# Altium PCB L1S2.PcbDoc
Units mm, origin at the board's own origin, x right, y up, seen from the top; angles counter-clockwise.
Board outline 25.4 x 30.61 mm, 2 copper layers (Top Layer, Bottom Layer); 16 components, 18 nets, 72 pads, 4 vias.
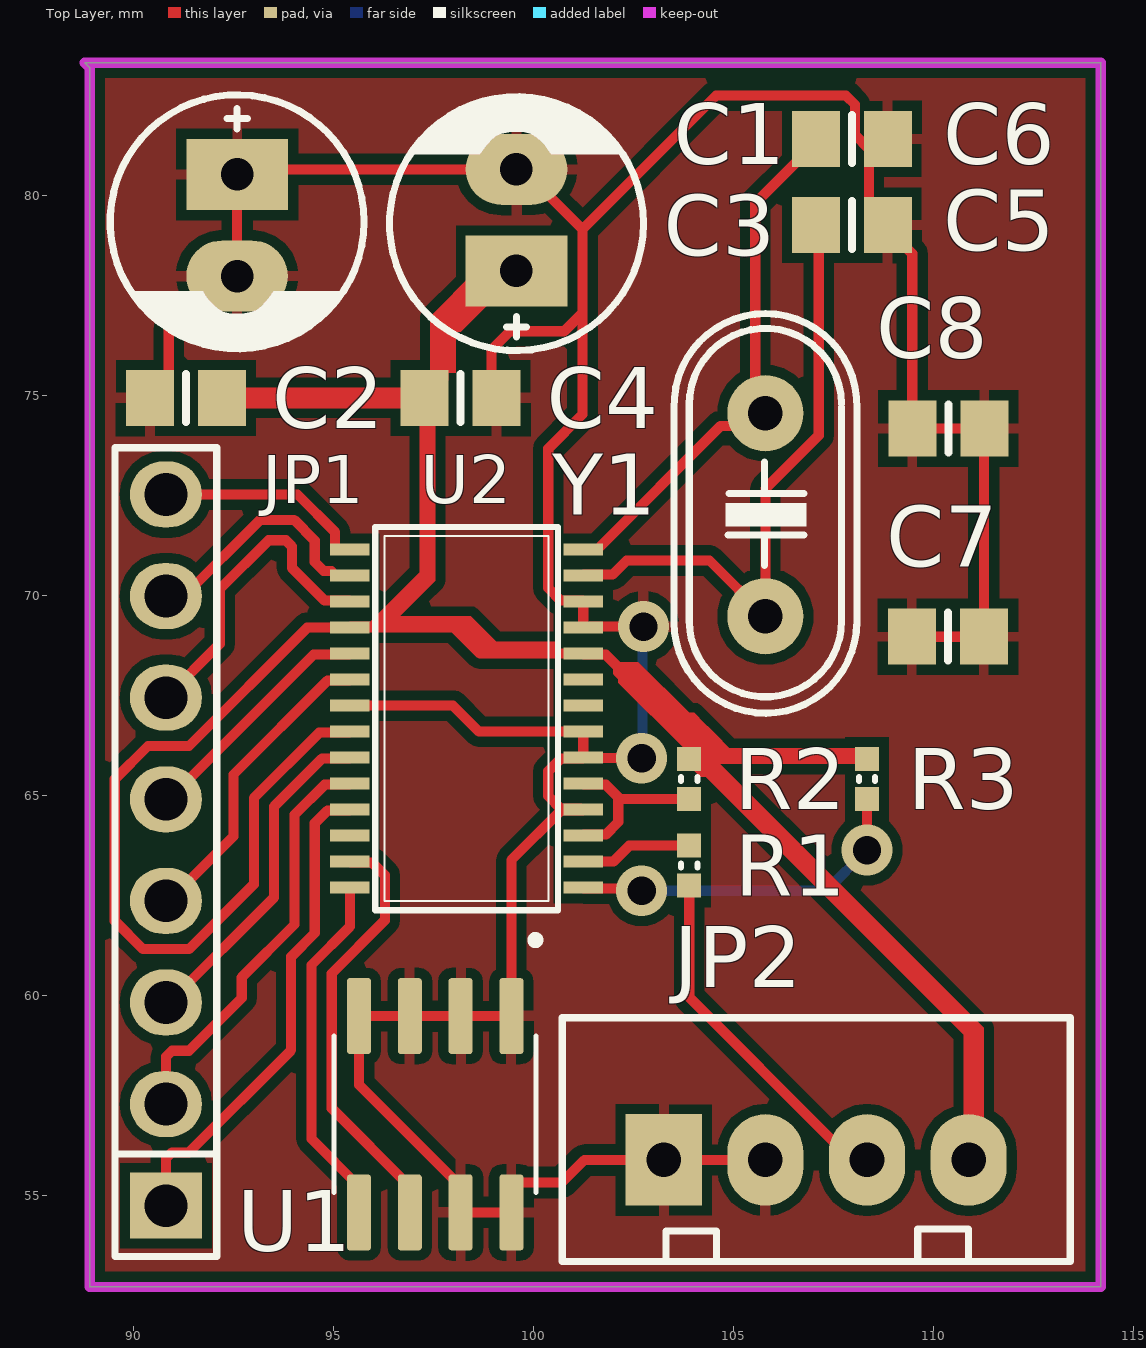
[diagram p0: Top Layer view]
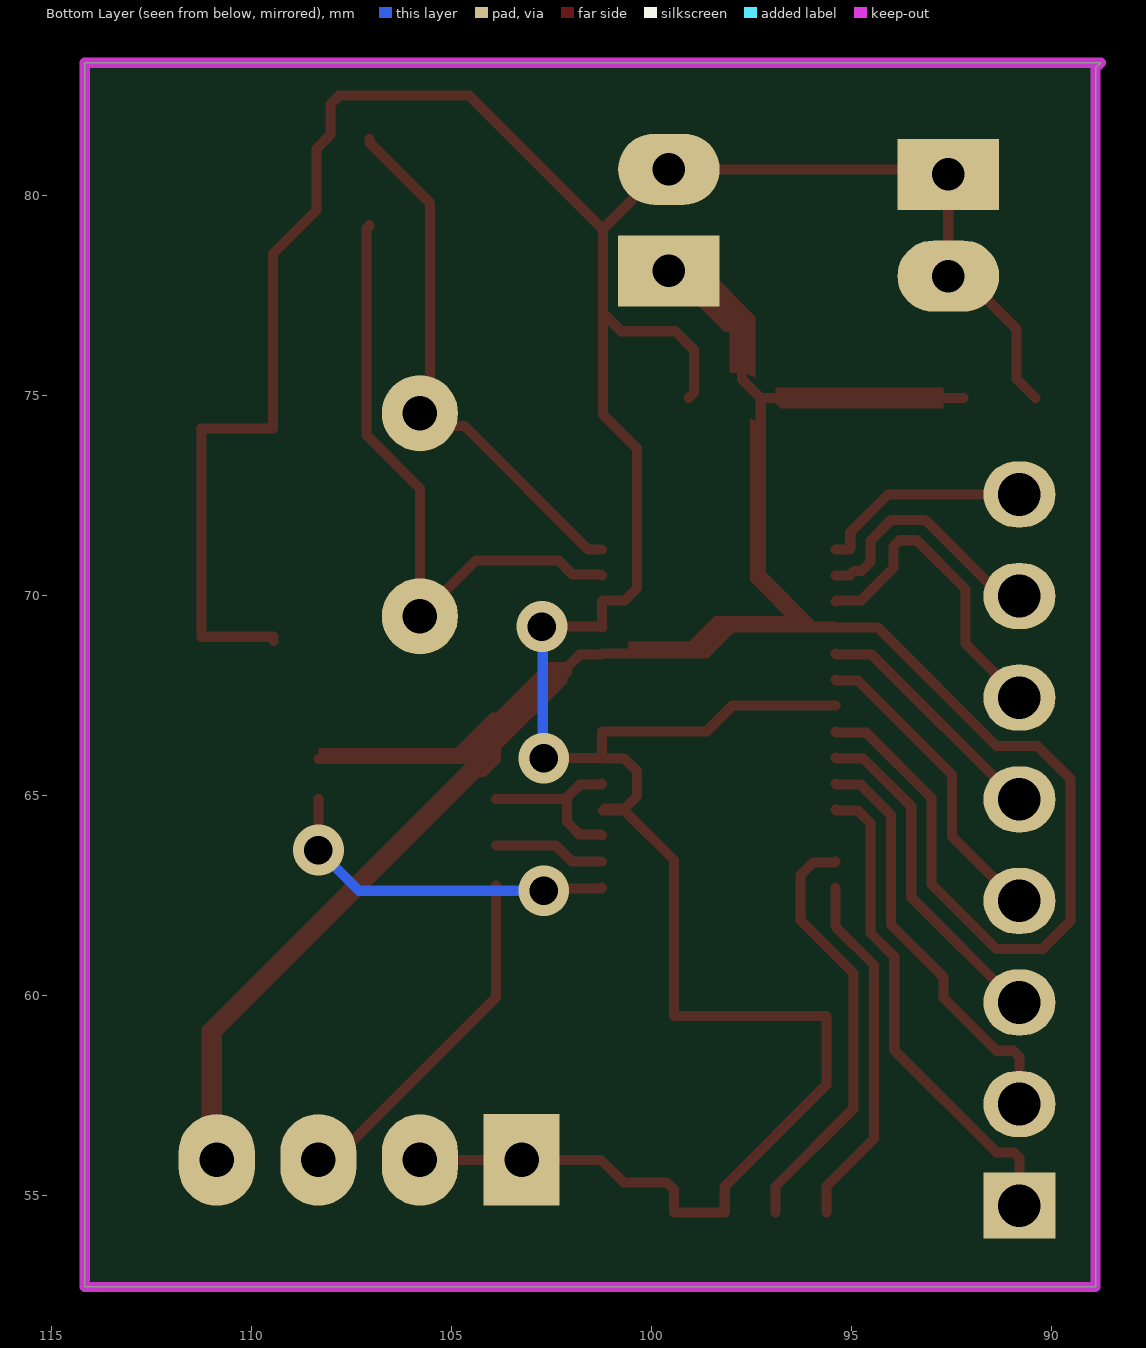
[diagram p1: Bottom Layer view, seen from below]
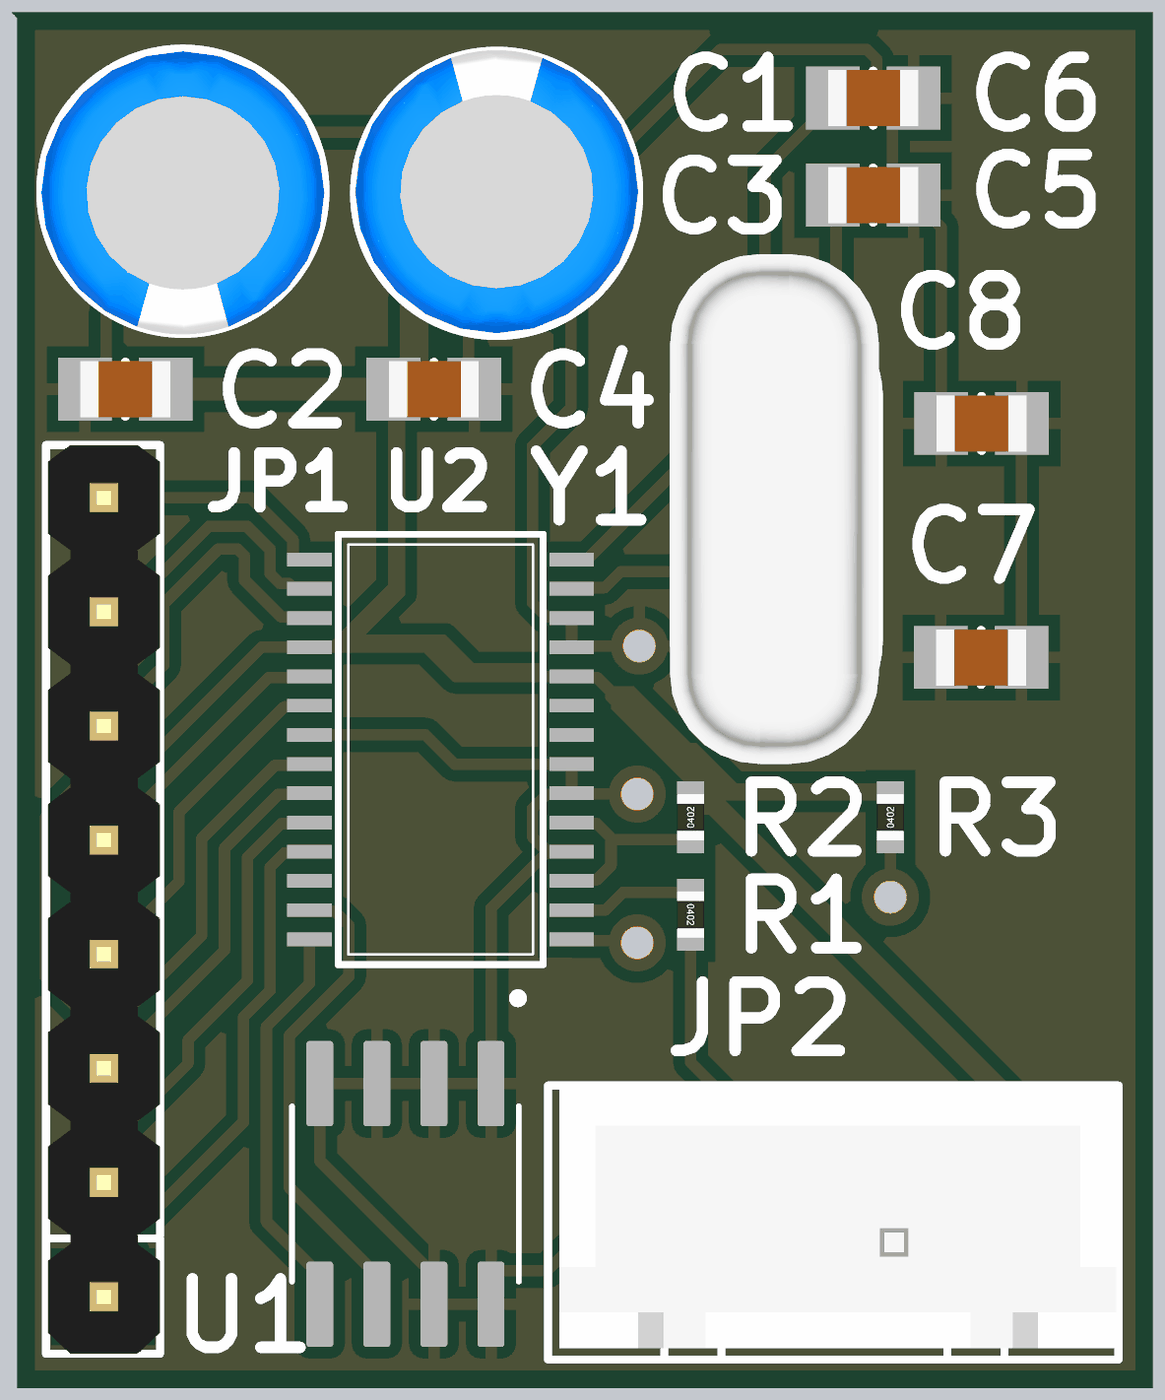
[diagram p2: 3D render of the assembled board from above, using the file's embedded part models]

## Layer stack, top to bottom
Top Solder: solder mask 0.0102, Solder Resist, Dk 3.5
Top Layer: signal copper 0.0356
Dielectric 1: dielectric 0.32, FR-4, Dk 4.8
Bottom Layer: signal copper 0.0356
Bottom Solder: solder mask 0.0102, Solder Resist, Dk 3.5

## Board outline
88.773,83.312 88.9,83.185 88.9,52.705 114.173,52.705 114.173,83.312

## Design rules (kind name [scope] priority, off if disabled: settings)
Clearance [All] p1: gap=0.254 ignorepadtopadclearanceinfootprint=FALSE except(0: Arc-Hole Track-Hole SMDPad-Hole THPad-Hole Via-Hole Fill-Hole Poly-Hole Region-Hole Text-Hole)
MinimumSolderMaskSliver [All] p1: minsoldermaskwidth=0
PolygonConnect [All] p1: connectstyle=Relief reliefconductorwidth=0.254 reliefentries=4 polygonreliefangle="90 Angle" airgapwidth=0.254
RoutingVias [All] p1: holewidth=0.711 width=1.27 viastyle="Through Hole" minholewidth=0.711 minwidth=1.27 maxholewidth=0.711 maxwidth=1.27
SilkToSolderMaskClearance [IsPad] p1: minsilkscreentomaskgap=0 clearancetoexposedcopper=TRUE
SolderMaskExpansion SolderMaskExpansion_Via [All] p1: expansion=0.102 istentingtop=TRUE
SolderMaskExpansion [IsVia] p2: expansion=0.102 istentingtop=TRUE
Width [All] p1: maxlimit=0.254 minlimit=0.254 preferedwidth=0.254
28 further rules are at their usual default settings.

## Classes and differential pairs
component class L1S2: C1 C2 C4 C5 C6 JP1 JP2 R2 R3 U1 U2 Y1

## Components (designator, comment, footprint, x,y, rotation, side; value= is the part's Value field where it differs from the comment)
C1 "100uF" CP1/2.5 92.583,80.518 r270 top value="47uF/16 - 50V" (schematic designator C6)
C2 "100n" 0805_Cap 91.302,74.93 r0 top value=103 (schematic designator C8)
C3 "10uF" CP1/2.5 99.568,78.105 r90 top value="47uF/16 - 50V" (schematic designator C5)
C4 "100n" 0805_Cap 98.171,74.93 r180 top value=103 (schematic designator C7)
C5 "22p" 0805_Cap 107.95,79.248 r180 top value=103 (schematic designator C2)
C6 "22p" 0805_Cap 107.95,81.407 r0 top value=103 (schematic designator C3)
C7 "100n" 0805_Cap 110.352,68.961 r180 top value=103 (schematic designator C4)
C8 "100n" 0805_Cap 110.363,74.168 r0 top value=103 (schematic designator C1)
JP1 "JP8 PIN" JP8 90.805,54.737 r90 top value=JP7
JP2 "JP4" CON4 103.251,55.88 r0 top value="Connector 4"
R1 "22R" 0402_res 103.886,63.238 r270 top value="R1/4W - 1K" (schematic designator R2)
R2 "1K5" 0402_res 103.886,65.405 r90 top value="R1/4W - 1K" (schematic designator R1)
R3 "22R" 0402_res 108.331,65.405 r90 top value="R1/4W - 1K"
U1 "AT24C04C-SSPD-T" SOIC127P600X175-8N 97.536,57.023 r270 top
U2 "PL2303HX" TSSOP28 98.425,67.183 r0 top
Y1 "12MHz" XT2 105.791,72.009 r270 top

## Footprints (in the part's own frame and the unit in brackets; to place one, negate y for a bottom-side part, rotate by r counter-clockwise, add the part's x,y. Pads: shape width x height; smd on the part's side, far side on the other; paste and mask are expansions set on the pad)
0402_res [mm]
  rect 0.6x0.6 smd mask+0: 1(-0.5,0) 2(0.5,0)
  silkscreen extent -0.05,-0.2 0.05,0.2, body extent -0.52,-0.3 0.52,0.3, height 0.34
0805_Cap [mm] "Chip Resistor, Body 2.0x1.2mm, IPC Medium Density"
  rect 1.2x1.4 smd: 1(-0.9,0) 2(0.9,0)
  silkscreen extent 0,-0.6 0,0.6, body extent -1,-0.62 1,0.63, height 0.6
CON4 [mil] "CON4"
  rect 75x90 hole 34: 1(0,0)
  oval 75x90 hole 34: 2(100,0) 3(200,0) 4(300,0)
  silkscreen extent -100,-100 400,140, body extent -90,-90 398,136, height 276
CP1/2.5 [mil] "Tu hoa 33 >100 uF,50V, 220uF/16V,25V"
  rect 70x100 hole 32: 1(0,0)
  oval 70x100 hole 32: 2(100,0)
  silkscreen extent -78,-125 172,125, body extent -76,-124 172,124, height 422
JP8 [mil] "JP8"
  rect 65x70.87 hole 42: 1(0,0)
  oval 65x70.87 hole 42: 2(100,0) 3(200,0) 4(300,0) 5(400,0) 6(500,0) 7(600,0) 8(700,0)
  silkscreen extent -50,-50 746,50, body extent -50,-50 746,48, height 323
SOIC127P600X175-8N [mm]
  rrect25% 1.9x0.6 smd: 1(-2.455,1.905) 2(-2.455,0.635) 3(-2.455,-0.635) 4(-2.455,-1.905) 5(2.455,-1.905) 6(2.455,-0.635) 7(2.455,0.635) 8(2.455,1.905)
  silkscreen extent -4.45,-2.52 1.95,2.6
TSSOP28 [mil]
  rect 39x12 smd: 1(-119.01,155.71) 2(-119.01,130.12) 3(-119.01,104.53) 4(-119.01,78.94) 5(-119.01,53.35) 6(-119.01,27.76) 7(-119.01,2.17) 8(-119.01,-23.43) 9(-119.01,-49.02) 10(-119.01,-74.61) 11(-119.01,-100.2) 12(-119.01,-125.79) 13(-119.01,-151.38) 14(-119.01,-176.97) 15(110.74,-176.97) 16(110.74,-151.38) 17(110.74,-125.79) 18(110.74,-100.2) 19(110.74,-74.61) 20(110.74,-49.02) 21(110.74,-23.43) 22(110.74,2.17) 23(110.74,27.76) 24(110.74,53.35) 25(110.74,78.94) 26(110.74,104.53) 27(110.74,130.12) 28(110.74,155.71)
  silkscreen extent -94,-199 86,178
XT2 [mil] "Footpin for Crystal 2 pin"
  round 75 hole 34: 1(-100,0) 2(100,0)
  silkscreen extent -198,-90 195,90, body extent -233,-93 213,90, height 138

## Part data
C1 C3: library part CP2, "C 47uF/50V , 220uF/16V", Description 1="470uF/6,3V - 330uF/10V - 220uF/16V", Description 2="100uF/25V - 35V - 47uF/50V - 22uF/100V", Description 3="33uF => 47uF/63V - 1uF => 4,7uF/160V", Description 4="1uF => 2,2uF/250V - 1uF/350V"
C2 C4 C5 C6 C7 C8: library part CM, "Cap SMD"
JP1: library part JP8
JP2: library part Con4, "Connector 4"
R1 R2 R3: library part R, "Resistor 1/4W"
U1: "EEPROM Memory IC 4Kb _512 x 8_ IÂ²C 400kHz 900ns 8-SOIC", Package="SOIC-8 Microchip Technology", Availability=Unavailable, MF="Microchip Technology", MP=AT24C04C-SSPD-T, Price=None, SnapEDA_Link=https://www.snapeda.com/parts/AT24C04C-SSPD-T/Microchip/view-part/3611049/?ref=snap
U2: "USB to RS232 TSSOP28", Package=None, Availability=Unavailable, MF="Prolific Technology", MP=PL-2303HX, Price=None, SnapEDA_Link=https://www.snapeda.com/parts/PL-2303HX/Prolific%20Technology/view-part/598561/?ref=snap
Y1: library part XTAL, "Crystal Oscillator", LatestRevisionDate=17-Jul-2002, LatestRevisionNote="Re-released for DXP Platform.", PackageDescription="Crystal, Thru-Hole; 2 Leads; Body 3.1 x 8.2 mm (Dia.xH)", PackageReference=R38, Published=8-Jun-2000, Publisher="Altium Limited"

## Via types
v1: diameter 1.27, hole 0.711, Top Layer to Bottom Layer, tented both sides, 4 vias

## Nets (pads, with @x,y where several pads share a name; then routed paths per layer and width w, separated by ;. In a path a pad name is that pad's centre, name@x,y a point inside that pad or via, vN(x,y) a via of type N, cw(c..) or ccw(c..) an arc to the next point about the centre after c; other vN are vias at no path point)
3V3: C2.2 C3.1 C4.2 JP2.4 R2.2 R3.2 U2.4 U2.8 U2.24 | length 64.8
  Top Layer w0.254: C2.2 C4.2 ; U2.8 95.377,66.563 94.635,66.563 93.002,64.929 93.002,62.773 91.379,61.151 90.231,61.151 89.524,61.857 89.524,65.397 90.358,66.23 91.379,66.23 94.337,69.188 U2.4 ; C3.1 99.187,78.105 97.744,76.662 97.744,75.403 C4.2 ; R3.2 108.327,65.901 R2.2@103.89,65.901 ; JP2.4 110.871,59.059 104.344,65.586 104.205,65.586 R2.2@103.89,65.901 ; U2.4 98.008,69.188 98.658,68.538 U2.24 101.263,68.513 101.8,68.513 102.114,68.198 102.114,68.074 102.624,67.564 103.164,67.564 103.886,66.842 R2.2 R2.2@103.89,65.901 ; U2.4 95.428,69.213 95.964,69.213 97.271,70.52 C4.2
GND: C1.1 C1.2 C2.1 C3.2 C4.1 C5.1 C6.2 C7.1 C7.2 C8.1 C8.2 JP2.1 JP2.2 U1.1 U1.2 U1.3 U1.4 U1.7 U1.8 U2.7 U2.18 U2.20 U2.21 U2.25 U2.26 | length 97
  Top Layer w0.254: C2.1 90.875,75.403 90.875,76.651 92.202,77.978 C1.2 C1.1 92.71,80.645 C3.2 99.726,80.645 101.219,79.152 ; U2.7 97.982,67.238 98.632,66.588 U2.21 U2.20 ; C4.1 98.944,75.057 98.944,76.138 99.404,76.598 100.759,76.598 101.219,77.058 ; v1(102.697,65.921) 102.688,65.93 101.246,65.93 U2.20 ; v1(102.743,69.215) 101.727,69.215 101.725,69.213 101.263,69.213 U2.25 U2.26 101.212,69.863 100.676,69.863 100.362,70.178 100.362,73.663 101.219,74.521 101.219,77.058 ; JP2.2 JP2.1 101.264,55.88 100.7,55.316 99.614,55.316 99.441,55.143 U1.8 U1.7 98.171,55.218 95.631,57.758 U1.4 U1.3 U1.2 U1.1 99.441,63.378 100.676,64.613 101.212,64.613 101.162,64.663 100.676,64.663 100.362,64.978 100.362,65.598 100.676,65.913 101.212,65.913 U2.20 ; C7.2@109.452,68.861 C7.2 C7.1 111.252,74.157 C8.2 C8.1 109.463,78.535 108.377,79.621 108.377,81.162 108.031,81.508 108.031,82.265 107.808,82.488 104.555,82.488 101.219,79.152 ; 101.219,77.058 101.219,79.152
  Bottom Layer w0.254: v1(102.697,65.921) 102.72,65.944 102.72,69.192 v1(102.743,69.215)
NetC2_2: C5.2 U2.27 Y1.2 | length 15.7
  Top Layer w0.254: U2.27 101.263,70.513 101.97,70.513 102.322,70.866 104.394,70.866 Y1.2 105.791,72.663 107.124,73.997 107.124,79.173 C5.2
NetC3_1: C6.1 U2.28 Y1.1 | length 13.2
  Top Layer w0.254: U2.28 101.581,71.138 104.676,74.233 105.221,74.233 105.537,74.549 105.537,79.794 107.05,81.307 C6.1
NetJP1_1: JP1.1 U2.11 | length 12.4
  Top Layer w0.254: JP1.1 90.805,55.922 90.954,56.07 91.379,56.07 93.934,58.625 93.934,60.963 94.526,61.555 94.526,63.13 94.526,64.298 94.84,64.613 95.377,64.613 U2.11
NetJP1_2: JP1.2 U2.10 | length 10.5
  Top Layer w0.254: JP1.2 90.805,58.462 90.954,58.61 91.379,58.61 92.699,59.93 92.699,60.446 94.018,61.765 94.018,64.509 94.772,65.263 95.377,65.263 U2.10
NetJP1_3: JP1.3 U2.9 | length 8.5
  Top Layer w0.254: JP1.3 90.88,59.817 93.51,62.447 93.51,64.719 94.703,65.913 95.377,65.913 U2.9
NetJP1_4: JP1.4 U2.6 | length 7.8
  Top Layer w0.254: JP1.4 90.88,62.357 92.494,63.971 92.494,65.516 94.84,67.863 95.377,67.863 U2.6
NetJP1_5: JP1.5 U2.5 | length 6.1
  Top Layer w0.254: JP1.5 90.88,64.897 94.495,68.513 95.377,68.513 U2.5
NetJP1_6: JP1.6 U2.3 | length 8
  Top Layer w0.254: JP1.6 92.152,68.784 92.152,70.154 93.373,71.374 93.798,71.374 93.952,71.219 93.952,70.683 94.772,69.863 95.377,69.863 U2.3
NetJP1_7: JP1.7 U2.2 | length 6.3
  Top Layer w0.254: JP1.7 91.258,69.977 93.163,71.882 94.008,71.882 94.526,71.364 94.526,70.828 94.749,70.605 94.943,70.605 95.059,70.488 U2.2
NetJP1_8: JP1.8 U2.1 | length 5.4
  Top Layer w0.254: JP1.8 94.092,72.517 95.034,71.575 95.034,71.163 95.059,71.138 U2.1
NetJP2_3: JP2.3 R1.2 | length 8.9
  Top Layer w0.254: R1.2 103.886,59.944 107.444,56.386 107.825,56.386 JP2.3
NetR1_1: R2.1 U2.17 U2.19 | length 4.4
  Top Layer w0.254: U2.17 101.263,64.013 101.8,64.013 102.114,64.328 102.114,64.948 ; U2.19 101.263,65.263 101.8,65.263 102.114,64.948 ; R2.1 102.157,64.905 102.114,64.948
NetR2_1: R1.1 U2.16 | length 2.8
  Top Layer w0.254: U2.16 101.987,63.338 102.387,63.738 R1.1
NetR3_1: R3.1 U2.15 | length 8.8
  Top Layer w0.254: U2.15 101.263,62.663 102.645,62.663 v1(102.697,62.611) ; v1(108.331,63.627) R3.1
  Bottom Layer w0.254: v1(102.697,62.611) 107.315,62.611 v1(108.331,63.627)
NetU1_5: U1.5 U2.14 | length 9
  Top Layer w0.254: U2.14 95.402,61.712 94.442,60.752 94.442,56.407 95.631,55.218 U1.5
NetU1_6: U1.6 U2.13 | length 10.8
  Top Layer w0.254: U2.13 95.428,63.313 95.964,63.313 96.278,62.998 96.278,61.87 94.95,60.542 94.95,57.169 96.901,55.218 U1.6
pads on no net: U2.12 U2.22 U2.23

## Polygon pours and split planes (outlines as drawn)
GND on Top Layer "GND_L01_P004" (solid, pour order 4): 114.046,52.832 89.027,52.832 89.027,83.185 114.046,83.185

## Keep-outs
Keep-Out Layer:
  the board outline again, w0.254

## Other copper
Top Layer:
  region net 3V3: 102.114,68.074 102.114,67.812 103.759,66.167 104.176,66.167 104.3,66.291 102.631,67.96 102.228,67.96
  region net 3V3: 103.886,66.842 104.053,66.842 104.14,66.929 104.331,66.739 104.14,66.548
  region net 3V3: 104.394,66.675 105.029,66.04 104.339,66.04 104.206,65.907
  region net 3V3: 103.822,66.778 104.243,66.778 104.267,66.802 104.394,66.675 104.394,66.04 103.894,66.04 103.888,66.034 103.886,66.036 103.886,67.056 104.013,67.056 104.267,66.802
  region net 3V3: 102.362,68.326 102.616,68.326 103.886,67.056 103.886,66.167 102.624,67.429 102.624,67.564
  region net 3V3: 104.521,65.913 111.252,59.182 111.252,55.88 110.871,56.261 110.871,59.059 104.029,65.901 103.89,65.901
  region net 3V3: 103.886,66.167 108.331,66.167 108.327,66.163 108.327,65.901 103.89,65.901
  region net 3V3: 102.874,67.564 103.759,66.679 103.759,66.715 103.886,66.842 103.164,67.564
  region net 3V3: 101.957,68.355 101.986,68.326 102.362,68.326 103.124,67.564 102.624,67.564
  region net 3V3: 96.52,69.469 98.425,69.469 99.06,68.834 100.584,68.834 100.584,68.58 100.542,68.538 98.658,68.538 97.982,69.213 96.178,69.213
  region net 3V3: 97.536,74.422 97.536,70.358 96.391,69.213 95.964,69.213 97.282,70.531 97.282,74.295
  region net 3V3: 92.71,75.184 96.901,75.184 96.901,74.803 96.774,74.676 92.71,74.676
  region net 3V3: 97.409,75.438 97.409,76.962 98.552,78.105 99.568,78.105 99.949,77.724 99.314,77.724 98.171,76.581 98.044,76.581 98.044,75.565 97.663,75.565